# Altium PCB PCB2.PcbDoc
Units mil, origin at the board's own origin, x right, y up, seen from the top; angles counter-clockwise.
Board outline 866.14 x 866.14 mil, 4 copper layers (Top Layer, Internal Plane 1, Signal Layer 1, Bottom Layer), stack 30.634 mil thick; 54 components, 32 nets, 173 pads, 243 vias.
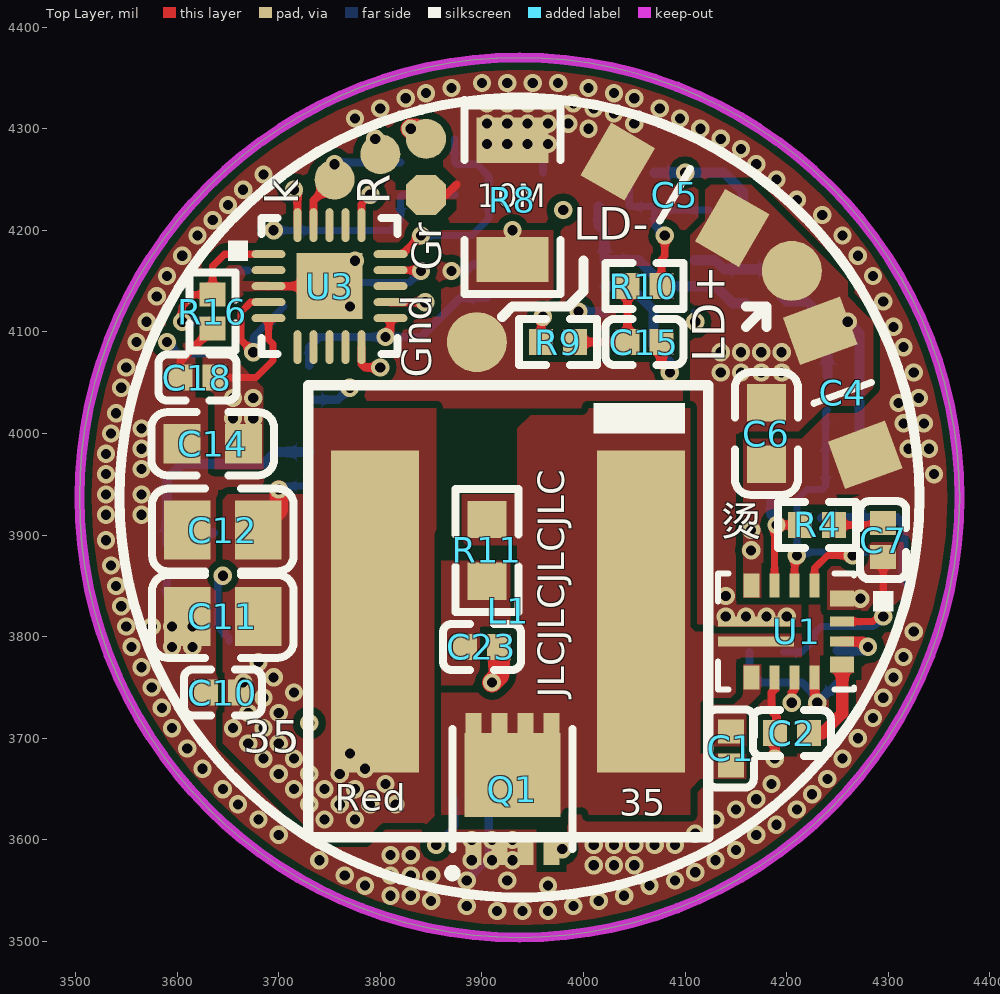
[diagram p0: Top Layer view]
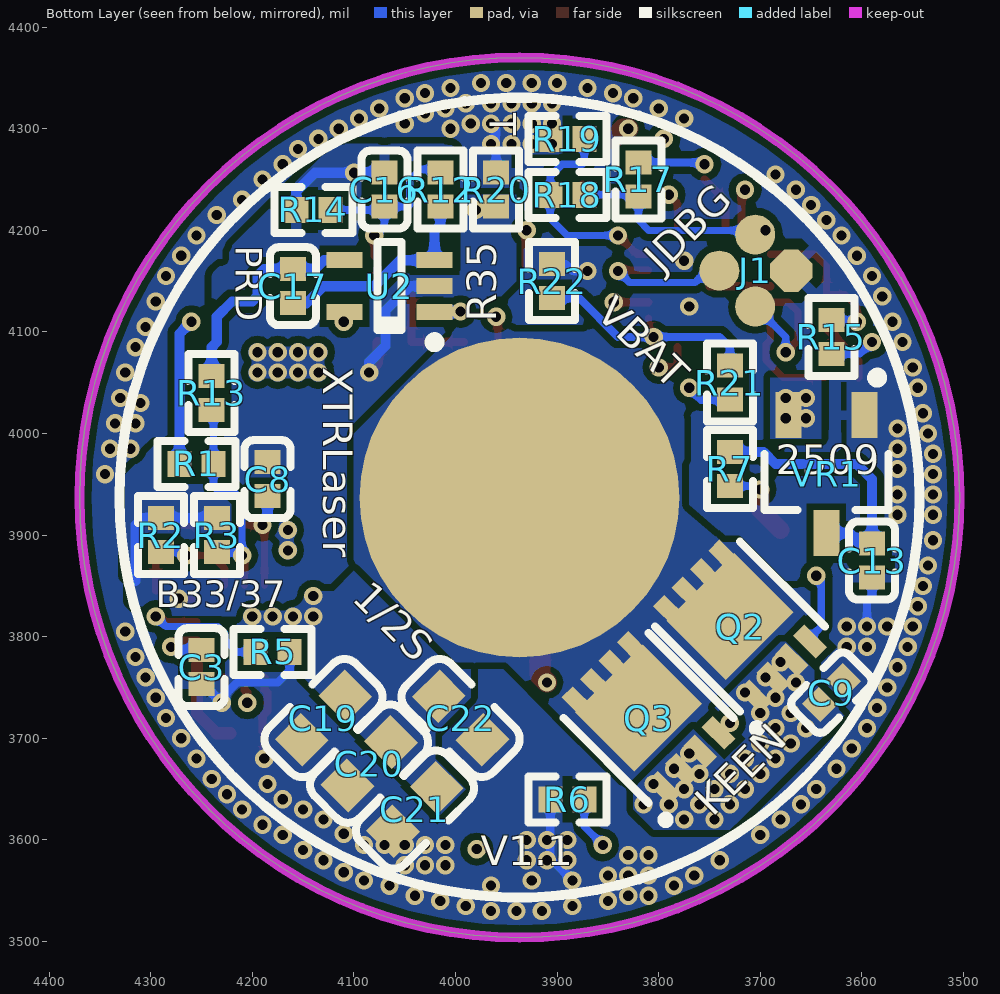
[diagram p1: Bottom Layer view, seen from below]
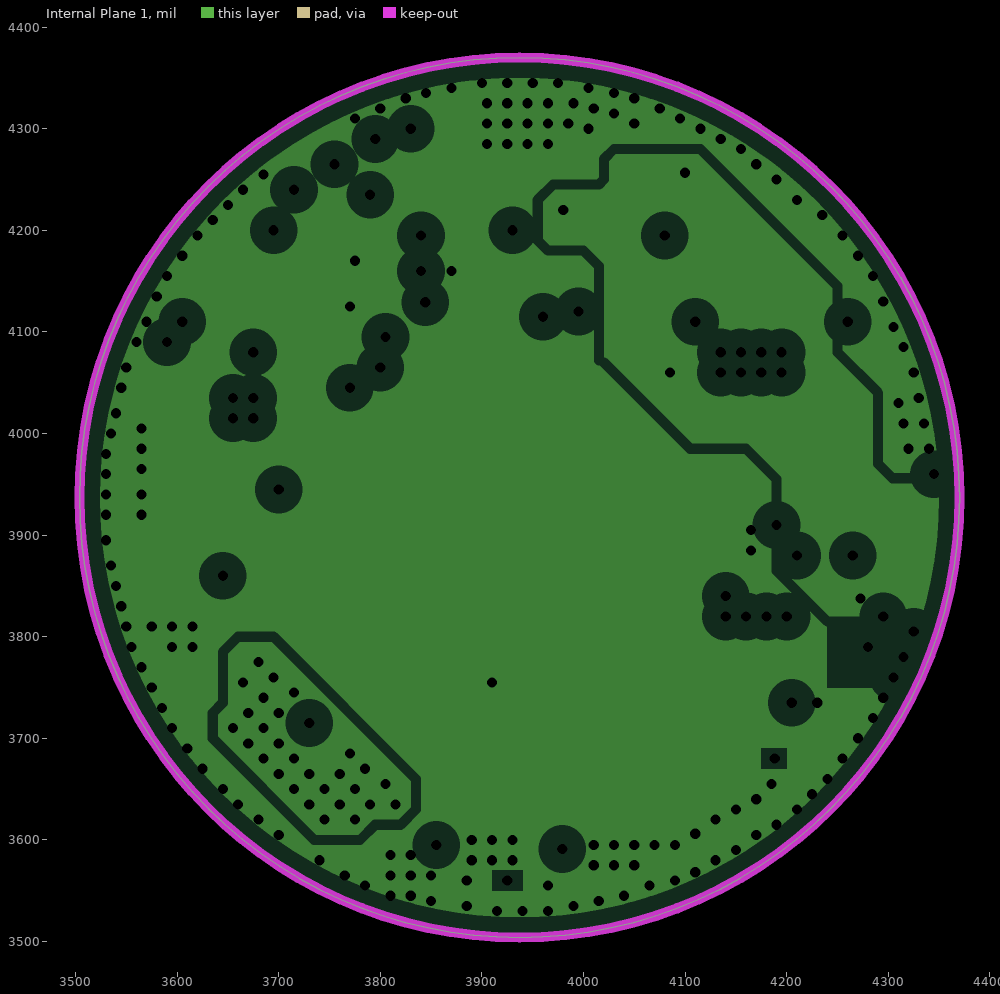
[diagram p2: Internal Plane 1, clearances drawn from the general rule]
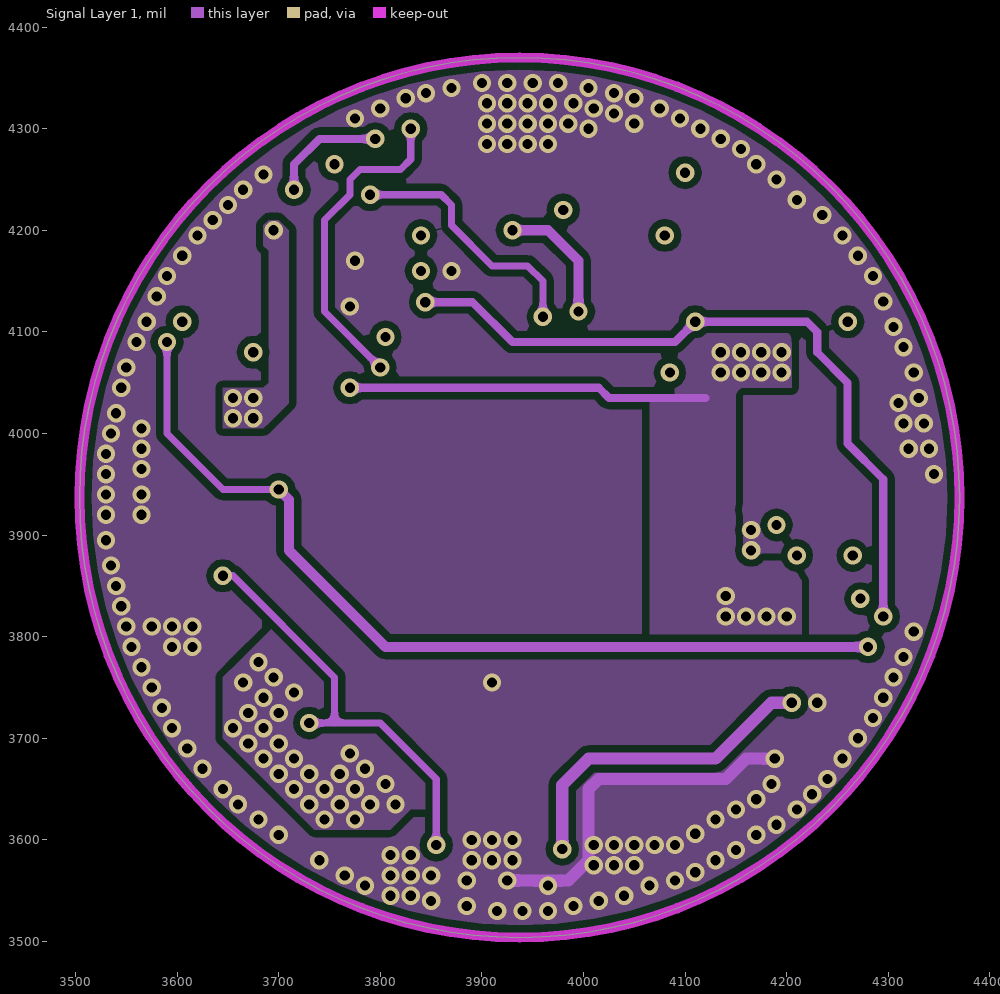
[diagram p3: Signal Layer 1]
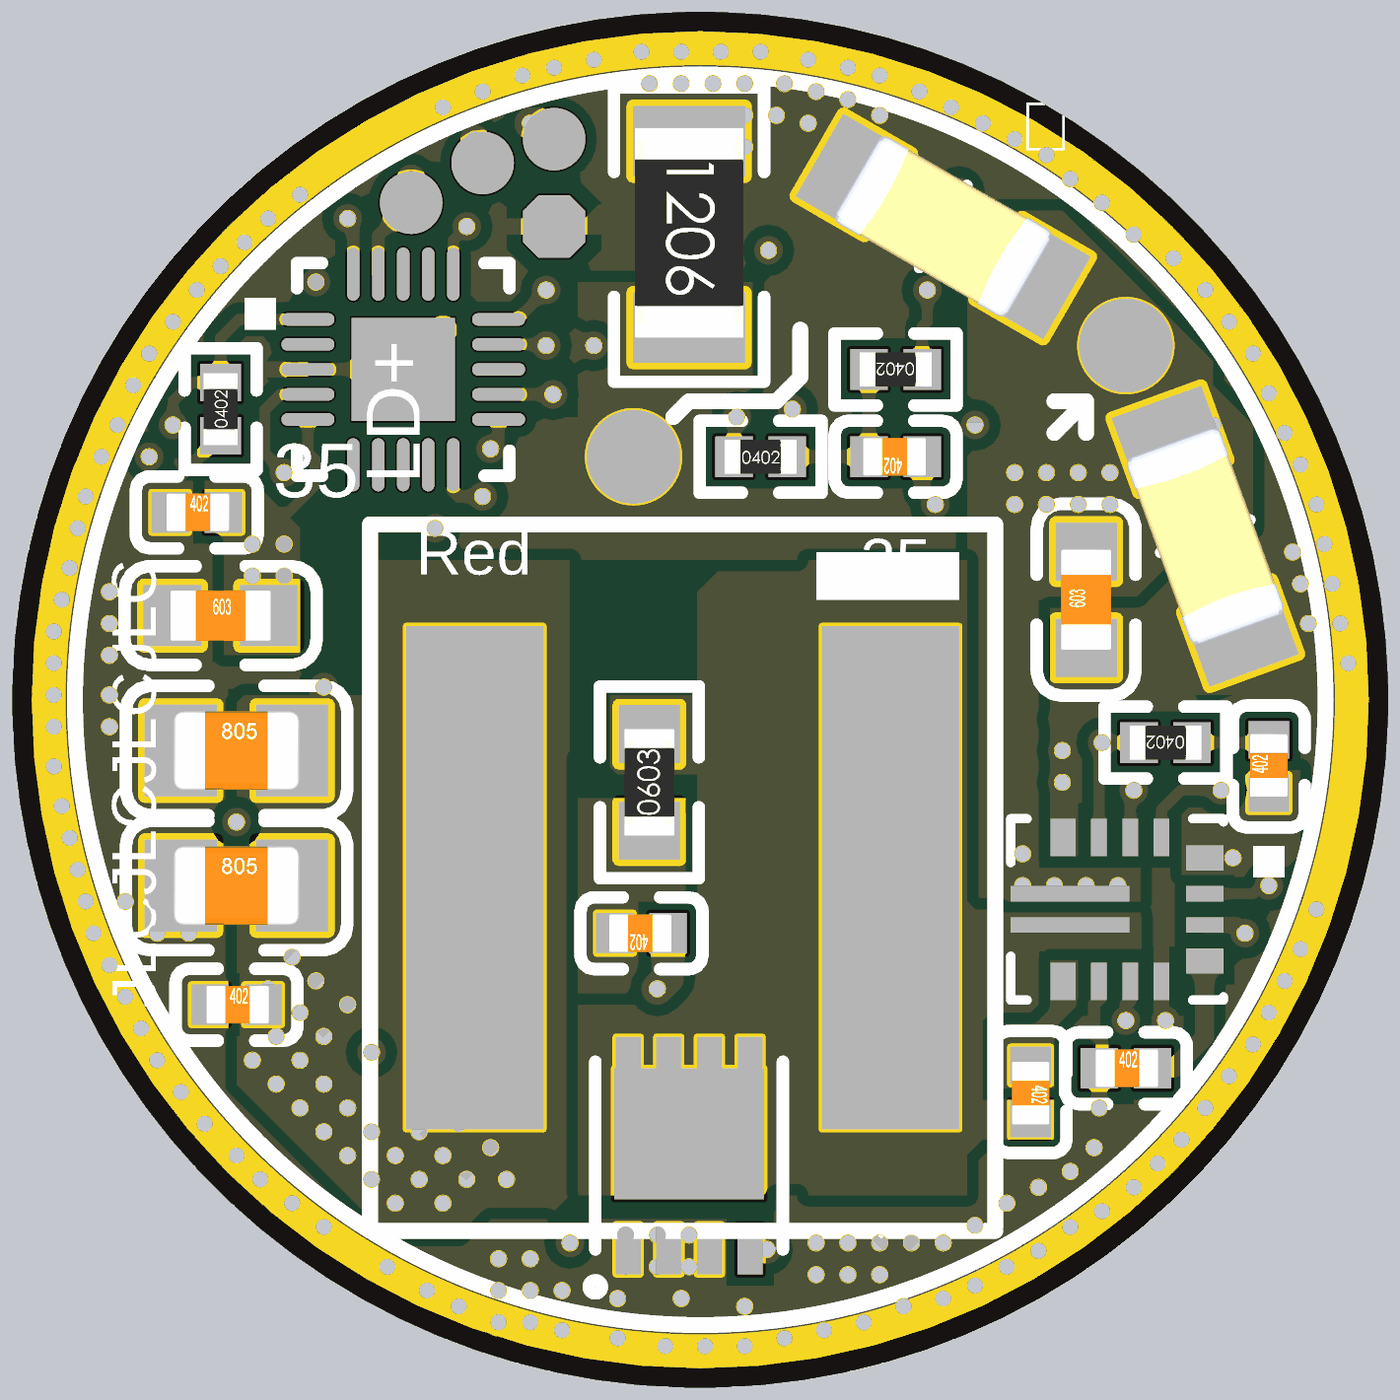
[diagram p4: 3D render of the assembled board from above, using the file's embedded part models]
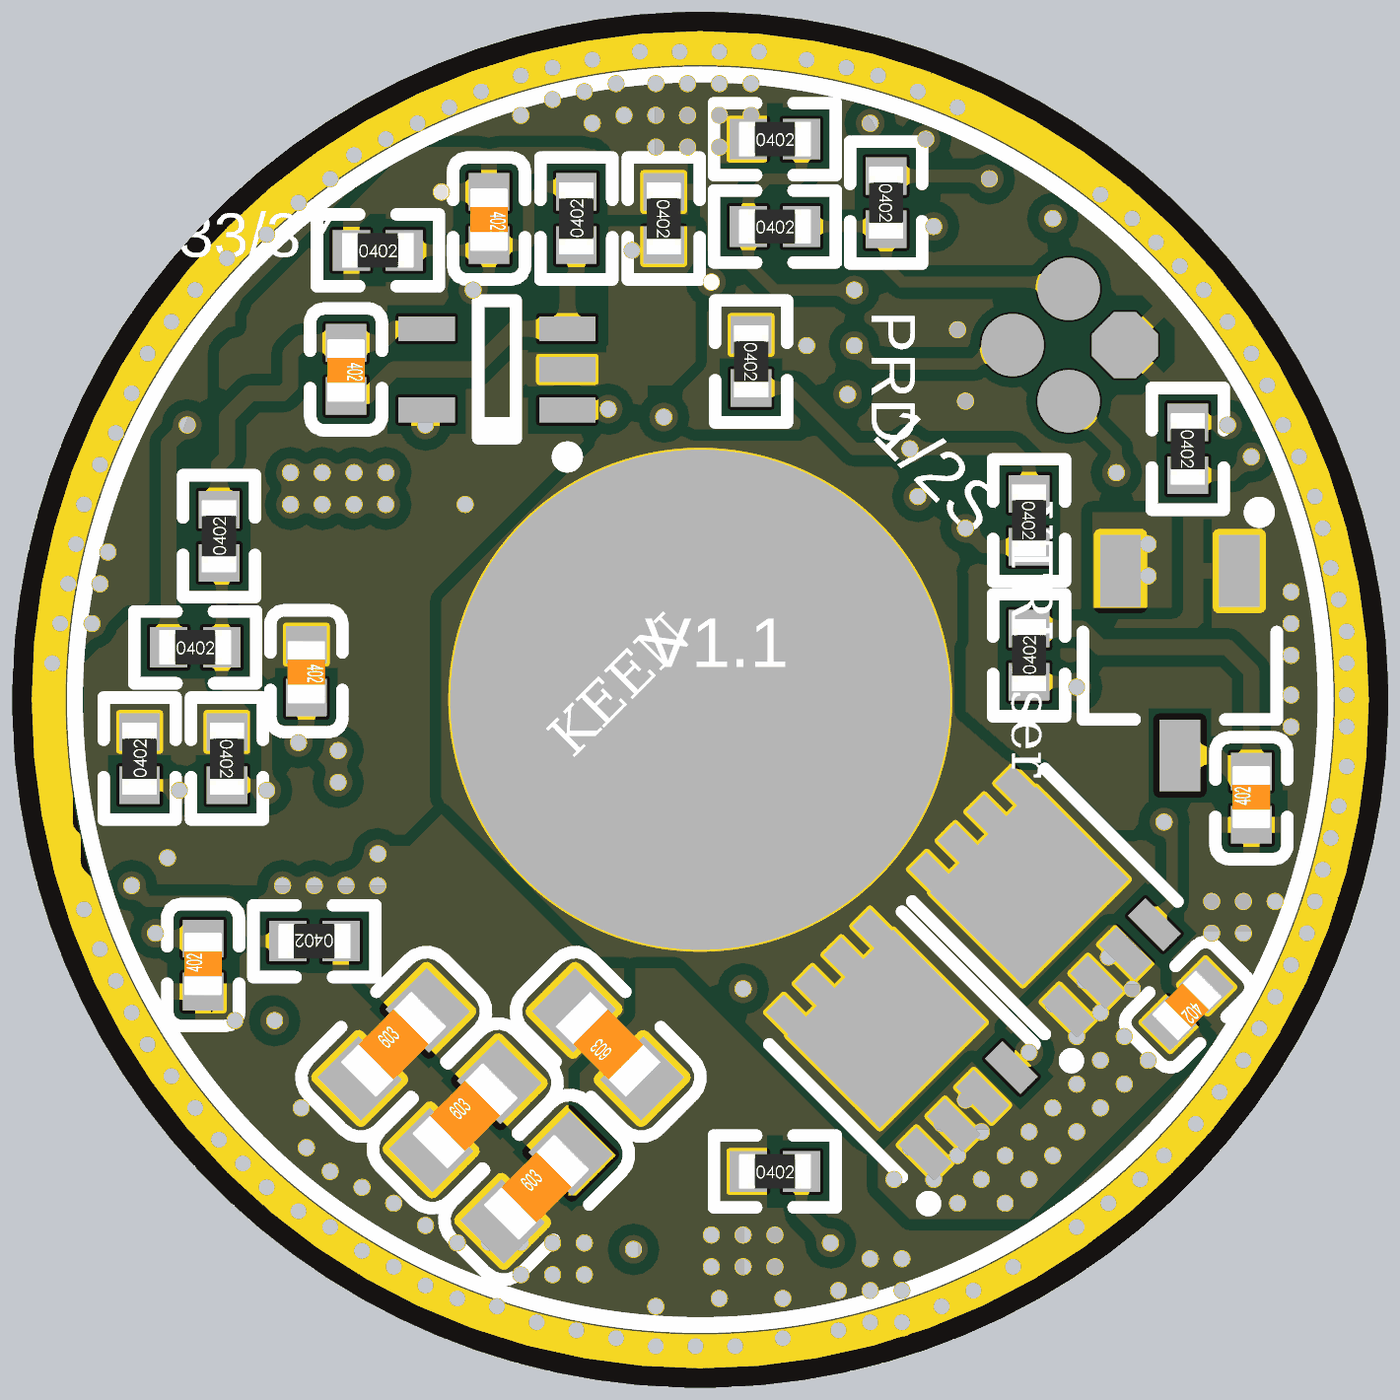
[diagram p5: 3D render of the assembled board from below, using the file's embedded part models]

## Layer stack, top to bottom
Top Solder: solder mask 0.4, Solder Resist, Dk 3.5
Top Layer: signal copper 1.4
Dielectric 1: core 10, FR-4, Dk 4.2
Internal Plane 1: plane copper 1.417
Dielectric 3: prepreg 5, Dk 4.2
Signal Layer 1: signal copper 1.417
Dielectric 2: core 10, Dk 4.2
Bottom Layer: signal copper 1.4
Bottom Solder: solder mask 0.4, Solder Resist, Dk 3.5

## Board outline
3937.01,3503.94 cw(c3937.01,3937.01) 3503.94,3937.01 cw(c3937.01,3937.01) 3937.01,4370.08 cw(c3937.01,3937.01) 4370.08,3937.01 cw(c3937.01,3937.01)

## Design rules (kind name [scope] priority, off if disabled: settings)
Clearance [All] p1: gap=7
PlaneClearance [All] p1: clearance=18.5
PlaneConnect [All] p1: planeconnectstyle=Direct reliefexpansion=20 reliefentries=4 reliefconductorwidth=10 reliefairgap=10
PolygonConnect PolygonConnect_1 [IsVia] p1: connectstyle=Direct reliefconductorwidth=10 reliefentries=4 polygonreliefangle="90 Angle" airgapwidth=10
PolygonConnect [All] p2: connectstyle=Direct reliefconductorwidth=10 reliefentries=4 polygonreliefangle="90 Angle" airgapwidth=10
RoomDefinition main [InComponentClass('main')] p1: confinementstyle=ConfineIn formatcopy=TRUE lockcomponents=FALSE outline 4435,3445 5340,3445 5340,3865 4435,3865
RoutingVias [All] p1: holewidth=28 width=50 viastyle="Through Hole" minholewidth=28 minwidth=50 maxholewidth=28 maxwidth=50
SolderMaskExpansion [All] p1: expansion=4
Width [All] p1: maxlimit=100 minlimit=7 preferedwidth=10
28 further rules are at their usual default settings.

## Components (designator, comment, footprint, x,y, rotation, side; value= is the part's Value field where it differs from the comment)
C1 "100nF (104) 10% 16V" 0402_C 4145,3690 r270 top
C2 "4.7uF (475) 20% 10V" 0402_C 4205,3705 r0 top
C3 "100nF (104) 10% 16V" 0402_C 4250,3770 r90 bottom
C4 "GRM31CR61E476ME44L" 1206C 4255,4040 r110 top
C5 "GRM31CR61E476ME44L" 1206C 4090,4235 r330 top
C6 "CL10A106MA8NRNC" 0603_C 4180,4000 r90 top
C7 "47nF (473) 10% 50V" 0402_C 4295,3895 r90 top
C8 "56pF (560) 5% 50V" 0402_C 4185,3955 r270 bottom
C9 "10uF (106) 20% 10V" 0402_C 3630,3745 r315 bottom
C10 "10uF (106) 20% 10V" 0402_C 3645,3745 r0 top
C11 "47uF (476) 20% 10V" 0805_C 3645,3820 r0 top
C12 "47uF (226) 20% 10V" 0805_C 3645,3905 r0 top
C13 "10uF (106) 20% 10V" 0402_C 3590,3875 r90 bottom
C14 "CL10A106MA8NRNC" 0603_C 3635,3990 r0 top
C15 "1.0uF (105) 10% 25V" 0402_C 4060,4090 r180 top
C16 "10nF (103) 10% 50V" 0402_C 4070,4240 r270 bottom
C17 "8.2nF (822) 10% 50V" 0402_C 4160,4145 r270 bottom
C18 "100nF (104) 10% 16V" 0402_C 3620,4055 r0 top
C19 "CL10A106MA8NRNC" 0603_C 4130,3720 r135 bottom
C20 "CL10A106MA8NRNC" 0603_C 4085,3675 r135 bottom
C21 "CL10A106MA8NRNC" 0603_C 4040,3630 r135 bottom
C22 "CL10A106MA8NRNC" 0603_C 3995,3720 r45 bottom
C23 "2.2nF (222) 10% 50V" 0402_C 3900,3790 r180 top
J1 "CMS8S-JTAG-TP-1.27mm" CMS8S-JTAG-TP-2x2-P1.27 3705,4125 r45 top
L1 "XAL1060-472MEC" XAL1060-472ME-LIFTED 3795,3825 r0 top
Q1 "BSZ018N04LS6" DFN-8_L3.0-W3.0-P0.65-BL 3930,3650 r0 top
Q2 "XPX80P02RX" DFN-8_L3.0-W3.0-P0.65-BL 3720,3810 r135 bottom
Q3 "XPX80P02RX" DFN-8_L3.0-W3.0-P0.65-BL 3810,3720 r135 bottom
R1 "470KΩ (4703) ±1%" 0402_R 4255,3970 r180 bottom
R2 "20KΩ (2002) ±1%" 0402_R 4290,3900 r90 bottom
R3 "39KΩ (3902) ±1%" 0402_R 4235,3900 r270 bottom
R4 "10KΩ (1002) ±1%" 0402_R 4230,3910 r180 top
R5 "10KΩ (1002) ±1%" 0402_R 4180,3785 r0 bottom
R6 "10KΩ (1002) ±1%" 0402_R 3890,3640 r180 bottom
R7 "10Ω (10R0) ±1%" 0402_R 3730,3965 r90 bottom
R8 "RLM12FTCMR010" 1206_R 3930,4230 r270 top
R9 "10KΩ (1002) ±1%" 0402_R 3975,4090 r0 top
R10 "110KΩ (1103) ±1%" 0402_R 4060,4145 r180 top
R11 "2.2Ω (2R20) ±1%" 0603_R 3905,3885 r90 top
R12 "470Ω (4700) ±1%" 0402_R 4015,4240 r90 bottom
R13 "100KΩ (1003) ±1%" 0402_R 4240,4040 r90 bottom
R14 "2KΩ (2001) ±1%" 0402_R 4140,4220 r180 bottom
R15 "470KΩ (4703) ±1%" 0402_R 3630,4095 r270 bottom
R16 "100KΩ (1003) ±1%" 0402_R 3635,4120 r90 top
R17 "10KΩ (1002) ±1%" 0402_R 3820,4250 r270 bottom
R18 "470KΩ (4703) ±1%" 0402_R 3890,4235 r180 bottom
R19 "SDNT1005X104F4250FTF" 0402_R 3890,4290 r180 bottom
R20 "0Ω (0R0) ±1%" 0402_R 3960,4240 r270 bottom
R21 "680KΩ (6803) ±1%" 0402_R 3730,4050 r270 bottom
R22 "59KΩ (5902) ±1%" 0402_R 3905,4150 r270 bottom
U1 "TPS61287RZPR" RZP0014A-TPS61287 4210,3805 r270 top locked
U2 "TSZ121ICT" SC70-5 4065,4145 r0 bottom
U3 "CMS8S6990NAQN20" QFN40P300X300X800_HS-21N 3750,4145 r0 top
VR1 "ME6209A30M3G" SOT-23-3L 3635,3960 r90 bottom locked

## Footprints (in the part's own frame and the unit in brackets; to place one, negate y for a bottom-side part, rotate by r counter-clockwise, add the part's x,y. Pads: shape width x height; smd on the part's side, far side on the other; paste and mask are expansions set on the pad)
0402_C [mm]
  rect 0.6x0.65 smd mask+0.051: 1(-0.425,0) 2(0.425,0)
  silkscreen extent -0.97,-0.58 0.97,0.58, body extent -0.48,-0.3 0.52,0.3, height 0.2
0402_R [mm]
  rect 0.6x0.65 smd mask+0.051: 1(-0.425,0) 2(0.425,0)
  silkscreen extent -0.97,-0.58 0.97,0.58, body extent -0.57,-0.27 0.57,0.28, height 0.41
0603_C [mm]
  rect 0.93x0.98 smd: 1(-0.77,0) 2(0.77,0)
  silkscreen extent -1.53,-0.79 1.54,0.79, body extent -0.8,-0.4 0.8,0.4, height 0.3
0603_R [mm]
  rect 0.93x0.98 smd: 1(-0.77,0) 2(0.77,0)
  silkscreen extent -1.53,-0.79 1.54,0.79, body extent -0.85,-0.4 0.85,0.4, height 0.56
0805_C [mm]
  rect 1.16x1.47 smd: 1(-0.89,0) 2(0.89,0)
  silkscreen extent -1.77,-1.04 1.77,1.04, body extent -1,-0.62 1,0.63, height 0.77
1206_R [mm]
  rect 1.13x1.8 smd: 1(-1.49,0) 2(1.49,0)
  silkscreen extent -2.36,-1.2 2.35,1.2, body extent -1.7,-0.86 1.65,0.87, height 0.85
1206C [mil]
  rect 50x60 smd: 1(-65,0) 2(65,0)
  silkscreen extent 0,-30 0,30, body extent -63,-31 63,31, height 37
CMS8S-JTAG-TP-2x2-P1.27 [mm] "面向CMS8S单片机使用的2*2排列，间距1.27mm的调试接口"
  oct 1x1 smd far side mask+0.03: 1(0,1.27)
  round 1 smd far side mask+0.03: 2(1.27,1.27) 3(0,0) 4(1.27,0)
DFN-8_L3.0-W3.0-P0.65-BL [mm]
  rect 0.4x0.8 smd paste-100 mask+0.051: 1(-0.975,-1.5) 2(-0.325,-1.5) 3(0.325,-1.5) 4(0.975,-1.5) 5(0.975,1.5) 6(0.325,1.5) 7(-0.325,1.5) 8(-0.975,1.5)
  rect 2.4x2.1 smd paste-100 mask+0.051: 8(0,0.35)
  silkscreen extent -1.6,-2.2 1.5,1.5, body extent -1.52,-1.52 1.52,1.52, height 1.2
QFN40P300X300X800_HS-21N [mm] "QFN, 20-Leads, Body 3.00x3.00mm, Pitch 0.40mm, Thermal Pad 1.65x1.65mm, IPC Medium Density"
  oval 0.85x0.2 smd mask+0.03: 1(-1.525,0.8) 2(-1.525,0.4) 3(-1.525,0) 4(-1.525,-0.4) 5(-1.525,-0.8) 11(1.525,-0.8) 12(1.525,-0.4) 13(1.525,0) 14(1.525,0.4) 15(1.525,0.8)
  oval 0.2x0.85 smd mask+0.03: 6(-0.8,-1.525) 7(-0.4,-1.525) 8(0,-1.525) 9(0.4,-1.525) 10(0.8,-1.525) 16(0.8,1.525) 17(0.4,1.525) 18(0,1.525) 19(-0.4,1.525) 20(-0.8,1.525)
  rect 1.65x1.65 smd mask+0.03: 21(0,0)
  silkscreen extent -1.7,-1.7 1.7,1.7, body extent -1.55,-1.55 1.55,1.55, height 0.8
RZP0014A-TPS61287 [mm]
  rect 0.6x0.25 smd paste+0 mask+0: 1(-1.15,0.443) 2(-1.15,-0.057) 3(-1.15,-0.557) 8(1.15,-0.557) 9(1.15,-0.057) 10(1.15,0.443)
  rect 0.6x0.4 smd paste+0 mask+0: 4(-1.15,-1.132) 7(1.15,-1.132)
  rect 0.25x1.9 smd paste+0 mask+0: 5(-0.25,-1.017) 6(0.25,-1.017)
  rect 0.4x0.6 smd paste+0 mask+0: 11(0.825,1.133) 14(-0.825,1.133)
  rect 0.25x0.6 smd paste+0 mask+0: 12(0.25,1.133) 13(-0.25,1.133)
  silkscreen extent -1.45,-1.97 1.45,1.43, body extent -1.4,-1.92 1.4,1.38, height 1
SC70-5 [mm] "SOT23, 6-Leads, Body 2.00x2.10mm, Pitch 0.65mm, IPC Medium Density"
  rect 0.9x0.4 smd mask+0.05: 1(-1.125,0.65) 2(-1.125,0) 3(-1.125,-0.65) 4(1.125,-0.65) 5(1.125,0.65)
  silkscreen extent -1.25,-1.1 0.3,1.52, body extent -0.67,-1.1 0.67,1.1, height 1.1
SOT-23-3L [mm] "http://www.aosmd.com/res/packaging_information/SOT-23-3L.pdf"
  rect 1.15x0.65 smd: 1(1.475,-0.95) 2(1.475,0.95) 3(-1.475,0)
  silkscreen extent -0.9,-1.55 2.54,1.55, body extent -0.9,-1.55 0.9,1.55, height 1.25
XAL1060-472ME-LIFTED [mm] "线艺XAL1060电感的特殊封装，使用铜条向上抬升电感高度在电感下部塞元器件"
  rect 2.2x8.05 smd mask+0.05: 1(0,0) 2(6.65,0)
  silkscreen extent -1.68,-5.65 8.32,5.65, body extent -1.65,-5.71 8.38,5.71, height 7

## Part data
C1 C3 C7 C18: library part "0402 100nF (104) 10% 16V", "贴片电容"
C2: library part "0402 4.7uF (475) 20% 10V", "贴片电容"
C4 C5: library part Cap, "村田1206 MLCC 25V 47uF± 20% X5R"
C6 C14 C19 C20 C21 C22: library part "0603 10uF (106) 10% 10V", "三星MLCC X5R 10uF ±20% 25V 0603封装"
C8: library part "0402 56pF (560) 5% 50V", "贴片电容"
C9 C10 C13: library part "0402 10uF (106) 20% 6.3V", "贴片电容"
C11 C12: library part "0805 22uF (226) 20% 25V", "贴片电容"
C15: library part "0402 1.0uF (105) 10% 25V", "贴片电容"
C16 C17: library part "0402 22nF (223) 10% 50V", "贴片电容"
C23: library part "0402 2.2nF (222) 10% 50V", "贴片电容"
J1: "面向CMS8S6990NA单片机的调试贴片触点，并不是元器件实物"
L1: library part "Inductor Iron", "线艺一体成型模压电感，9.8mΩ DCR 25A饱和电流 4.7uH±20%电感量 10*11*6mm尺寸"
Q1 Q2 Q3: library part "SON/DFN5x6 MOS", "PDFN3x3 30V 50A N沟道MOSFET"
R1 R15 R18 R21: library part "0402 470KΩ (4703) 1%", "贴片电阻"
R2: library part "0402 20KΩ (2002) 1%", "贴片电阻"
R3: library part "0402 39KΩ (3902) 1%", "贴片电阻"
R4: library part "0402 12KΩ (1202) 1%", "贴片电阻"
R5 R6 R9 R14 R17: library part "0402 10KΩ (1002) 1%", "贴片电阻"
R7: library part "0402 10Ω (10R0) 1%", "贴片电阻"
R8: library part "1206 0Ω (0R0) 1%", "10mΩ ±1% 1W 1206封装合金检流电阻"
R10: library part "0402 75KΩ (7502) 1%", "贴片电阻"
R11: library part "0603 2.2Ω (2R20) 1%", "贴片电阻"
R12: library part "0402 470Ω (4700) 1%", "贴片电阻"
R13 R16: library part "0402 100KΩ (1003) 1%", "贴片电阻"
R19: library part "0402 200KΩ (2003) 1%", "贴片热敏电阻0402 B4250 100K ±1%"
R20: library part "0402 0Ω (0R0) 1%", "贴片电阻"
R22: library part "0402 68KΩ (6802) 1%", "贴片电阻"
U1: library part TPS61287, "Synchronous Boost Converter with Stackable Multi-Phase Function"
U2: library part LMV321IDCKR, "CMOS超小型0漂移斩波结构运算放大器，SC70-5封装，400KHz GBW"
U3: library part CM8S6990NA-QFN20, "增强型闪存1T 8051单片机，16KB Flash 256+1K XRAM，QFN3x3-20P封装"
VR1: library part "SOT-23 XC6206P332MR", "低压差线性稳压(LDO)"

## Free pads (board coordinates)
  round 59.06 smd mask+1.18: 0(3895,4090) 0(4205,4160)
  round 314.96 smd far side mask+1.18: 1(3937.01,3937.01)
  round 39.37 smd mask+1.18: 2(3845,4290) 3(3800,4275) 4(3755,4250)
  oct 39.37x39.37 smd mask+1.18: 5(3845,4235)

## Via types
v1: diameter 18, hole 10, Top Layer to Bottom Layer, tented both sides, 243 vias

## Nets (pads, with @x,y where several pads share a name; then routed paths per layer and width w, separated by ;. In a path a pad name is that pad's centre, name@x,y a point inside that pad or via, vN(x,y) a via of type N, cw(c..) or ccw(c..) an arc to the next point about the centre after c; other vN are vias at no path point)
8V4: C3.2 C9.2 C10.2 C11.2 C12.2 L1.1 Q2.1 Q2.2 Q2.3 Q3.1 Q3.2 Q3.3 R7.1 R15.2 U1.12 | length 1079.7
  Top Layer w10: U1.12 4274.84,3795.16 v1(4280,3790)
  Top Layer w18: C12.2 3700,3924.96 v1(3700,3945)
  Signal Layer 1 w7: v1(3590,4090) 3590,4000 3645,3945 v1(3700,3945)
  Signal Layer 1 w10: v1(3700,3945) 3710,3935 3710,3885 3805,3790 v1(4280,3790)
  Bottom Layer w7: v1(3590,4090) 3601.73,4078.27 R15.2 ; v1(3700,3945) 3703.27,3948.27 R7.1
  Bottom Layer w10: C3.2 4276.73,3786.73 v1(4280,3790)
  other v1: 3745,3620 3775,3620 3730,3635 3760,3635 3790,3635 3815,3635 3715,3650 3745,3650 3775,3650 3805,3655 3700,3665 3730,3665 3760,3665 3785,3670 3685,3680 3715,3680 3770,3685 3670,3695 3700,3695 3655,3710 3685,3710 3670,3725 3700,3725 3685,3740 3715,3745 3665,3755 3695,3760 3680,3775
BST: C1.1 U1.7
COMP: C8.2 R4.2 U1.3 | length 111.2
  Top Layer w7: U1.3 4188.05,3903.05 4195,3910 R4.2
  Bottom Layer w10: C8.2 4185,3920 4190,3915 v1(4190,3910)
DCEN: R5.2 U1.13 U2.5 U3.12 | length 928.6
  Top Layer w7: U1.13 4284.84,3814.84 4290,3820 v1(4295,3820)
  Top Layer w8: U3.12 v1(3844.25,4129.25)
  Signal Layer 1 w8: v1(3844.25,4129.25) 3890.75,4129.25 3930,4090 4090,4090 v1(4110,4110) 4220,4110 4230,4100 4230,4080 4260,4050 4260,3990 4295,3955 v1(4295,3820)
  Bottom Layer w7: U2.5 4109.29,4108.04 4110,4108.04 v1(4110,4110) ; R5.2 4215,3785 4226.7,3796.7 4226.7,3802.89 4233.81,3810 4285,3810 v1(4295,3820)
DSCK: J1.4 U3.14 | length 140.1
  Top Layer w7: U3.14 3839.25,4160.75 v1(3840,4160)
  Bottom Layer w7: J1.4@3740.71,4160 J1.4 3752.42,4160.36 3764.31,4148.46 3828.46,4148.46 v1(3840,4160)
DSDA: J1.3 U3.4 | length 133.3
  Top Layer w7: v1(3675,4080) 3662.73,4092.27 3662.73,4119.48 3672.5,4129.25 U3.4
  Bottom Layer w7: v1(3675,4080) 3675,4095 J1.3
FB: R1.2 R3.2 R13.1 U1.2 | length 219.8
  Top Layer w7: U1.2 4207.74,3879.27 v1@4211.73,3883.27
  Bottom Layer w7: R3.2 4211.73,3883.27 4210,3885 4210,3935 4220,3945 4235,3945 4238.27,3948.27 R1.2 4238.27,4021.54 R13.1
  other v1: 4210,3880
GLED: pad.2 U3.10 | length 372
  Top Layer w8: U3.10 3781.5,4068.5 3785,4065 v1(3800,4065)
  Top Layer w20: v1(3830,4300) 3835,4300 pad.2
  Signal Layer 1 w7: v1(3800,4065) 3745,4120 3745,4210 3770,4235 3770,4250 3780,4260 3820,4260 3830,4270 v1(3830,4300)
GND: C2.1 C3.1 C4.1 C5.1 C6.1 C9.1 C10.1 C11.1 C12.1 C13.1 C14.1 C18.1 C19.1 C20.1 C21.1 C22.1 C23.1 J1.1 pad.5 Q1.1 Q1.2 Q1.3 R5.1 R6.1 R8.1 R16.1 R19.1 R20.1 R22.1 U1.4 U1.8 U1.10 U3.3 U3.21 VR1.1 | length 1020
  Top Layer w8: C18.1 3603.27,4071.54 R16.1 ; U3.3 U3.21 ; pad.5 3864.8,4235 3875,4245.2 ; U1.8 4188.05,3748.05 4185,3745 4185,3726.72 4190,3721.72 4190,3706.73 C2.1 v1(4188.27,3680) ; v1@4227.42,3735 U1.10
  Top Layer w20: v1(3910,3755) 3916.73,3761.73 C23.1
  Signal Layer 1 w12: v1(3925,3560) 3985,3560 4005,3580 4005,3650 4015,3660 4140,3660 4160,3680 v1(4188.27,3680)
  Bottom Layer w8: C13.1 3590,3840 3595,3835 v1(3595,3810) ; J1.1@3659.64,4160.36 J1.1 ; v1(3870,4160) 3885,4160 3891.73,4166.73 R22.1 ; v1(3885,3560) 3906.73,3581.73 R6.1 ; R20.1 v1@3960,4305 ; R5.1 4163.27,3766.73 4175,3755 4215,3755 4230,3740 v1(4230,3735) 4248.27,3753.27 C3.1
  other v1: 3915,3530 3940,3530 3965,3530 3885,3535 3990,3535 3850,3540 4015,3540 3810,3545 3830,3545 4040,3545 3785,3555 3965,3555 4065,3555 4090,3560 3765,3565 3810,3565 3830,3565 3850,3565 4110,3568.19 4010,3575 4030,3575 4050,3575 3740,3580 3890,3580 3910,3580 3930,3580 4130,3580 3810,3585 3830,3585 4150,3590 4010,3595 4030,3595 4050,3595 4070,3595 4090,3595 3890,3600 3910,3600 3930,3600 3700,3605 4170,3605 4110,3606.01 4190,3615 3680,3620 4130,3620 4150,3630 4210,3630 3660,3635 4170,3640 4225,3645 3645,3650 4185,3655 4240,3660 3625,3670 4255,3680 3610,3690 4270,3700 3595,3710 4285,3720 3585,3730 4295,3740 3575,3750 4305,3760 3565,3770 4315,3780 3555,3790 3595,3790 3615,3790 4325,3805 3550,3810 3575,3810 3615,3810 3545,3830 3540,3850 3535,3870 4165,3885 3530,3895 4165,3905 3530,3920 3565,3920 3530,3940 3565,3940 3530,3960 4345,3960 3565,3965 3530,3980 3565,3985 4320,3985 4340,3985 3535,4000 3565,4005 4315,4010 4335,4010 3540,4020 4310,4030 4330,4035 3545,4045 4325,4060 3550,4065 4315,4085 3560,4090 4305,4105 3570,4110 3770,4125 4295,4130 3580,4135 3590,4155 4285,4155 3775,4170 3605,4175 4270,4175 3620,4195 4255,4195 3635,4210 4235,4215 3650,4225 4210,4230 3665,4240 4190,4250 3685,4255 4170,4265 4155,4280 3905,4285 3925,4285 3945,4285 3965,4285 4135,4290 4005,4300 4115,4300 3905,4305 3925,4305 3945,4305 3965,4305 3985,4305 4050,4305 3775,4310 4095,4310 4030,4315 3800,4320 4010,4320 4075,4320 3905,4325 3925,4325 3945,4325 3965,4325 3990,4325 3825,4330 4050,4330 3845,4335 4030,4335 3870,4340 4005,4340 3900,4345 3925,4345 3950,4345 3975,4345
ILIM: R2.1 U1.1 | length 91.3
  Top Layer w7: U1.1 4227.42,3867.42 4240,3880 v1(4265,3880)
  Bottom Layer w7: v1@4260,3880 4270,3880 4273.27,3883.27 R2.1
INJO: C17.1 R13.2 U2.4 | length 220.8
  Bottom Layer w10: U2.4 4129.41,4170.59 4138.27,4161.73 C17.1 4188.27,4161.73 4195,4155 4195,4135 4200,4130 4220,4130 4235,4115 4235,4090 4240,4085 R13.2
INTVCC: C2.2 U1.11 | length 88.9
  Top Layer w12: C2.2 4235,3705 4254.59,3724.59 U1.11
IPWM: R9.1 U3.16 | length 311.1
  Top Layer w7: U3.16 3781.5,4226.5 v1(3790,4235) ; R9.1 3958.27,4113.27 v1(3960,4115)
  Signal Layer 1 w7: v1(3790,4235) 3860,4235 3870,4225 3870,4205 3910,4165 3945,4165 3960,4150 v1(3960,4115)
KEY: pad.4 R17.1 U3.19 | length 118.6
  Top Layer w8: U3.19 3734.25,4229.25 pad.4
  Bottom Layer w8: v1@3755,4266.73 R17.1
  other v1: 3755,4265
LD-: pad.0@3895,4090 R8.2 U2.1 | length 187
  Top Layer w10: R8.2@3930,4166.34 v1(3930,4200)
  Signal Layer 1 w10: v1(3930,4200) 3965,4200 3995,4170 v1(3995,4120)
  Bottom Layer w10: v1(3995,4120) 3995.59,4119.41 U2.1
LDRV: Q1.4 U1.9 | length 360.4
  Top Layer w8: Q1.4 v1(3979.06,3590.94) v1@3980,3590 ; v1(4205,3735) 4205,3745 4207.74,3747.74 U1.9
  Signal Layer 1 w12: v1(3979.06,3590.94) 3979.06,3654.06 4005,3680 4130,3680 4185,3735 v1(4205,3735)
NetC7_2: C7.2 R4.1 | length 49
  Top Layer w7: R4.1 4293.27,3910 C7.2
NetC13_2: C13.2 R7.2 VR1.3 | length 263.6
  Bottom Layer w10: VR1.3 3611.93,3901.93 3601.73,3891.73 C13.2 3590,3955 3605,3970 3685,3970 3696.73,3981.73 R7.2
NetC15_2: C15.2 R9.2 R10.2 | length 106.5
  Top Layer w8: R9.2 C15.2 R10.2
NetC23_2: C23.2 R11.1
OPNEG: C17.2 R12.1 U2.3 | length 211.9
  Bottom Layer w10: R12.1 4015,4205 4020.71,4199.29 U2.3 4054.41,4170.59 4080,4145 4130,4145 4146.73,4128.27 C17.2
REVG: Q2.4 Q3.4 R6.2 | length 533.1
  Signal Layer 1 w7: v1(3645,3860) 3655,3860 3755,3760 3755,3715 ; v1(3730,3715) 3755,3715 ; v1(3855,3595) 3855,3660 3800,3715 3755,3715
  Bottom Layer w7: v1(3645,3860) 3640,3855 3640,3810 3651.09,3798.91 Q2.4 ; v1(3855,3595) 3873.27,3613.27 R6.2
RLED: pad.3 U3.20 | length 151.8
  Top Layer w8: v1(3715,4240) 3718.5,4236.5 U3.20
  Signal Layer 1 w8: v1(3715,4240) 3715,4265 3740,4290 v1(3795,4290)
SGND: C7.1 C8.1 C15.1 C16.1 R2.2 R3.1 R14.1 R20.2 U1.14 U2.2 | length 460.9
  Top Layer w7: U1.14 v1(4272.48,3837.48) ; 4295,3845 C7.1
  Top Layer w10: C15.1 4076.73,4068.27 v1(4085,4060)
  Bottom Layer w10: U2.2 4045,4145 4069,4121 4069,4086.3 4085,4070.3 v1(4085,4060) ; C16.1 4138.27,4256.73 4156.73,4238.27 R14.1 ; R3.1 R2.2 4308.27,3916.73 4315,3910 4315,3855
  other v1: 3980,4220 4100,4256.73
SW: C1.2 L1.2 Q1.5 Q1.6 Q1.7 Q1.8 R11.2 U1.6
TEMPSEN: R18.1 R19.2 U3.15 | length 215.1
  Top Layer w7: U3.15 3821.5,4176.5 v1(3840,4195)
  Bottom Layer w7: v1(3840,4195) 3890,4195 3906.73,4211.73 R18.1 3906.73,4253.27 3895,4265 3875,4265 3873.27,4266.73 R19.2
VBAT: pad.1 Q2.5 Q2.6 Q2.7 Q2.8 Q3.5 Q3.6 Q3.7 Q3.8
VBATSEN: R15.1 R16.2 U3.1 | length 163.6
  Top Layer w7: v1(3605,4110) 3605,4125 3616.73,4136.73 R16.2 3635,4165 3646.5,4176.5 U3.1
  Bottom Layer w7: v1(3605,4110) 3606.73,4111.73 R15.1
VLD: C4.2 C5.2 C6.2 C19.2 C20.2 C21.2 C22.2 pad.0@4205,4160 R1.1 R21.2 U1.5 | length 543.9
  Signal Layer 1 w8: v1(3770,4045) 4015,4045 4025,4035 4120,4035
  Bottom Layer w8: R21.2 3758.27,4033.27 v1(3770,4045)
  Bottom Layer w10: v1(4260,4110) 4271.73,4098.27 R1.1
  other v1: 4140,3820 4160,3820 4180,3820 4200,3820 4140,3840 4135,4060 4155,4060 4175,4060 4195,4060 4135,4080 4155,4080 4175,4080 4195,4080
VMCU: C14.2 C18.2 J1.2 R17.2 R18.2 U3.5 VR1.2 | length 314.6
  Top Layer w7: C18.2 3677.58,4055 3694.5,4071.92 3694.5,4088.08 3689.96,4092.62 U3.5
  Bottom Layer w7: v1(3695,4200) 3810,4200 3820,4210 R17.2 3821.73,4235 R18.2
  other v1: 3655,4015 3675,4015 3655,4035 3675,4035
VOUTSEN: R21.1 R22.2 U3.11 | length 233.9
  Top Layer w7: v1(3805,4095) 3810.04,4100.04 U3.11
  Bottom Layer w8: R21.1 3730,4085 3740,4095 v1(3805,4095) 3840,4095 3878.27,4133.27 R22.2
VREF: C16.2 R10.1 R12.2 R14.2 | length 230.3
  Top Layer w7: R10.1 4076.73,4171.73 4080,4175 v1(4080,4195)
  Bottom Layer w7: R12.2@4010,4255 4015,4260 4035,4260 4045,4250 4045,4225 4046.73,4223.27 C16.2 ; v1(4080,4195) 4070,4205 C16.2 ; R14.2 4073.27,4220 C16.2
pads on no net: U3.2 U3.6 U3.7 U3.8 U3.9 U3.13 U3.17 U3.18

## Polygon pours and split planes (outlines as drawn)
SW on Top Layer "Component Side-No Net 1" (solid, remove dead copper, pour order 64): 3940,3890 3885,3890 3880,3895 3880,3940 3935,3940 3940,3935
NetC23_2 on Top Layer "Component Side-No Net 1" (solid, remove dead copper, pour order 63): 3860,3745 3896.24,3745 3900,3748.76 3900,3810 3950,3810 3945,3815 3945,3875 3856.33,3875 3852.86,3871.54 3850,3868.67 3850,3750
SW on Top Layer "Component Side-No Net 1" (solid, remove dead copper, pour order 61): 3847.14,3617.14 3855,3625 4105,3625 4105,4025 4005,4025 3955,4025 3940,4010 3935,4005 3935,3965 3935,3770 3910,3745 3850,3745
LD- on Top Layer "Component Side-No Net 1" (solid, remove dead copper, pour order 80): 3860,4115 3830,4115 3730,4115 3735,4025 4105,4025 4105,4070 4100,4075 4095,4070 3930,4070 3930,4110 3925,4115
GND on Top Layer "Component Side-No Net 1" (solid, remove dead copper, pour order 79): 3440,4440 3440,3495 3480,3455 3615,3320 4090,3320 4370,3320 4450,3400 4510,3460 4510,4355 4510,4445 4455,4500
LD- on Top Layer "Component Side-No Net 1" (solid, remove dead copper, pour order 68): 3860,4055 3945,4055 3945,4100 3945,4115 3955,4125 3960,4130 3970,4130 3970,4200 3860,4200
VMCU on Top Layer "Component Side-No Net 1" (solid, remove dead copper, pour order 65): 3617.92,4074.8 3617.92,3972.08 3620,3970 3625,3965 3685,3965 3685,4045 3655,4075 3650,4075
GND on Top Layer "Component Side-No Net 1" (solid, remove dead copper, pour order 62): 3880.48,4366.37 3875,4360.89 3875,4240 4000,4240 4025,4215 4045,4195 4120,4195 4120,4155 4280,3995 4295,3980 4295,3960 4450,3960 4460,3970 4350,4080 4350,4540 3815,4540 3810,4545
GND on Top Layer "Component Side-No Net 1" (solid, remove dead copper, pour order 58): 3516.17,3940.05 3516.17,4036.17 3520,4075 3630,4075 3630,3954.77 3639.77,3945 3630,3935.23 3630,3905 3633.18,3905 3637.86,3900.32
GND on Top Layer "Component Side-No Net 1" (solid, remove dead copper, pour order 57): 3490,3945 3640,3945 3640,3705 3695,3650 3740,3605 3825,3605 3825,3525 3815,3515 3780,3480 3435,3480
8V4 on Top Layer "Component Side-No Net 1" (solid, remove dead copper, pour order 56): 3655,3940 3730,3940 3730,4030 3735,4025 3855,4025 3855,3625 3850,3620 3845,3615 3820,3615 3800,3615 3785,3600 3745,3600 3740,3600 3715,3625 3645,3695 3645,3710 3645,3935 3650,3940
SGND on Top Layer "Component Side-No Net 1" (solid, remove dead copper, pour order 55): 4240,3830 4240,3880 4280,3880 4280,3945 4315,3945 4320,3940 4315,3935 4315,3850 4315,3840 4295,3820 4290,3825 4240,3825
VLD on Top Layer "Component Side-No Net 1" (solid, remove dead copper, pour order 51): 4145,4000 4210,4000 4225,4015 4235,4025 4265,4025 4280,4040 4285,4045 4285,4085 4285,4110 4275,4120 4220,4120 4145,4120 4120,4095
GND on Top Layer "Component Side-No Net 1" (solid, remove dead copper, pour order 50): 4175,3835 4175,3925 4175,3935 4180,3940 4205,3940 4305,3940 4330,3965 4335,3970 4395,3970 4395,4055 4389.2,4049.2 4355.72,4049.2 4309.2,4049.2 4290,4030 4280,4020 4250,4020 4240,4020 4220,4000 4215,3995 4205,3995 4155,3995 4145,3985 4140,3980 4140,3835
VLD on Top Layer "Component Side-No Net 1" (solid, remove dead copper, pour order 49): 4215,3835 4214.34,3834.34 4214.34,3802.92 4112.08,3802.92 4110,3805 4105,3810 4105,3820 4105,4025 4105,4115 4105,4195 4120,4210 4120,4225 4120,4240 4125,4245 4155,4245 4165,4245 4260,4150 4260,4145 4260,4135 4270,4125 4275,4120 4275,4090 4275,4080 4270,4075 4255,4060 4205,4060 4195,4060 4180,4045 4150,4015 4150,3835
GND on Top Layer "Component Side-No Net 1" (solid, remove dead copper, pour order 48): 3875,3610 3960,3610 3960,3575 3980,3575 3985,3580 3985,3625 4105,3625 4110,3620 4110,3530 4110,3505 4100,3495 4080,3475 3795,3475 3795,3600 3805,3610
BST on Top Layer "Component Side-No Net 1" (solid, remove dead copper, pour order 47): 4125,3690 4130,3685 4160,3685 4160,3730 4175,3745 4175,3780 4155,3780 4153.54,3778.54 4150,3775 4150,3745 4145,3740 4120,3740 4115,3735 4115,3685
SW on Top Layer "Component Side-No Net 1" (solid, remove dead copper, pour order 46): 4115,3685 4160,3685 4160,3660 4115,3660 4105,3650 4105,3640 4105,3625 4005,3625 4005,4025 4105,4025 4105,3810 4110,3805 4145,3805 4215,3805 4215,3780 4190,3780 4155,3780 4150,3775 4150,3750 4150,3745 4145,3740 4135,3740 4120,3740 4115,3735
GND on Signal Layer 1 "Component Side-No Net 1" (solid, remove dead copper, pour order 76): 3485,3455 3500,3470 4315,3470 4315,3485 4380,3550 4445,3615 4445,3885 4445,4190 4435,4200 4335,4300 4335,4330 4260,4330 4110,4480 4095,4465 3725,4465 3680,4465 3610,4395 3490,4275
8V4 on Signal Layer 1 "Component Side-No Net 1" (solid, remove dead copper, pour order 74): 3730,3615 3735,3610 3790,3610 3810,3610 3830,3630 3855,3630 3855,3660 3800,3715 3755,3715 3755,3760 3705,3810 3700,3815 3660,3775 3645,3760 3645,3740 3645,3700
VLD on Signal Layer 1 "Component Side-No Net 1" (solid, remove dead copper, pour order 70): 4215,3810 4215,3790 4070,3790 4065,3795 4065,4035 4100,4035 4110,4045 4115,4050 4115,4090 4125,4090 4135,4080 4145,4070 4145,3980 4145,3865 4155,3855 4200,3855
VLD on Signal Layer 1 "Component Side-No Net 1" (solid, remove dead copper, pour order 89): 4090,3980 4090,4111.31 4103.76,4125.07 4110.9,4117.93 4227.93,4117.93 4227.93,3957.07 4235,3950 4235,3835 4235,3805 4220,3790 4070,3790
VMCU on Signal Layer 1 "Component Side-No Net 1" (solid, remove dead copper, pour order 87): 3645,4045 3685,4045 3690,4050 3690,4090 3690,4180 3685,4185 3685,4205 3690,4210 3700,4210 3705,4205 3710,4200 3710,4180 3710,4030 3690,4010 3685,4005 3660,4005 3645,4005
VLD on Signal Layer 1 "Component Side-No Net 1" (solid, remove dead copper, pour order 52): 4215,3810 4215,3835 4215,3855 4205,3865 4195,3875 4150,3875 4150,4005 4150,4040 4155,4045 4205,4045 4205,4090 4175,4090 4115,4090 4105,4080 4105,4040 4105,3815 4110,3810
GND on Bottom Layer "Component Side-No Net 1" (solid, remove dead copper, pour order 77): 3855.79,4140.79 3960.79,4140.79 3970,4150 3960,4160 3960,4223.27 3838.27,4223.27 3835,4220
VBAT on Bottom Layer "Component Side-No Net 1" (solid, remove dead copper, pour order 66): 3575,3590 4075,3400 4080.03,3677.12 4080.03,3805.03 4120,3845 4110,3855 4110,4045 4100,4045 4000,4145 3993.57,4138.57 3760.22,4138.57 3744.52,4138.57 3505.17,3899.23
GND on Bottom Layer "Component Side-No Net 1" (solid, remove dead copper, pour order 90): 3895,3605 3895,3690 3900,3695 3920.74,3715.74 3949.32,3715.74 3963.46,3715.74 3977.1,3702.1 3972.35,3697.35 3972.35,3605.7
GND on Bottom Layer "Component Side-No Net 1" (solid, pour order 88): 3767.86,3993.66 3770,3991.53 3770,3935 3770,3930 3735,3900 3720,3900 3685,3865 3675,3855 3605,3855 3565,3855 3560,3860 3540,3880 3540,4010
GND on Bottom Layer "Component Side-No Net 1" (solid, remove dead copper, pour order 86): 3570,3790.16 3649.25,3710.92 3831.79,3710.92 3849.25,3710.92 3861.25,3698.91 3856.79,3694.46 3856.79,3550.92 3671.79,3550.92 3646.79,3525.92 3621.79,3550.92 3531.79,3550.92
8V4 on Bottom Layer "Component Side-No Net 1" (solid, remove dead copper, pour order 85): 3720,3620 3730,3610 3790,3610 3805,3610 3825,3630 3825,3645 3825,3650 3815,3660 3680,3795 3675,3795 3645,3765 3617.06,3737.06 3617.06,3735 3617.06,3722.94 3620,3720
GND on Bottom Layer "Component Side-No Net 1" (solid, remove dead copper, pour order 84): 3620,3735 3640,3755 3640,3765 3640,3775 3610,3805 3605,3800 3570,3800 3570,3735 3595,3710
VBAT on Bottom Layer "Component Side-No Net 1" (solid, remove dead copper, pour order 83): 3775,3975 3775,3993.66 3742.64,4026.03 3740,4028.66 3740,4095 3880,4095 3895,4110 3910,4125 4035,4125 4035,4095 4110,4020 4105,4015 4105,3840 4080,3840 4020,3780 4015,3775 3875,3775
VLD on Bottom Layer "Component Side-No Net 1" (solid, remove dead copper, pour order 82): 4095,4035 4210,4035 4210,4095 4215,4100 4210.46,4104.54 4084.57,4104.54
SGND on Bottom Layer "Component Side-No Net 1" (solid, remove dead copper, pour order 81): 3940,4187.44 3970,4157.44 3970,3860 4060,3860 4095,3825 4106.18,3836.18 4179.35,3836.18 4179.35,4005.65 4110,4075
GND on Bottom Layer "Component Side-No Net 1" (solid, remove dead copper, pour order 78): 3436.88,3389.31 3466.88,3419.31 4301.88,3419.31 4301.88,3434.31 4396.88,3529.31 4456.88,3589.31 4456.88,4169.31 4456.88,4259.31 4351.88,4364.31 4306.88,4409.31 4091.88,4409.31 3611.88,4409.31 3576.88,4374.31 3431.88,4229.31 3406.88,4229.31
GND on Bottom Layer "Component Side-No Net 1" (solid, remove dead copper, pour order 75): 3915,3745 3930,3855 4055,3855 4065,3845 4080.09,3845 4080.09,3829.91 4150,3760 4155,3765 4205,3765 4220,3765 4265,3720 4340,3645 4340,3610 4340,3510 4300,3470 4210,3380 4155,3380 3960,3380 3950,3370 3925,3395 3925,3665 3925,3700 3895,3730
VLD on Bottom Layer "Component Side-No Net 1" (solid, remove dead copper, pour order 73): 4090,3875 4120,3845 4225,3845 4225,3810 4215,3800 4150,3800 4150,3760 4060,3670 4020,3630 4020,3625 4015,3625 3990,3650 4020,3680 4020,3705 3985,3740 3985,3795
GND on Bottom Layer "Component Side-No Net 1" (solid, remove dead copper, pour order 72): 3945,4275 3945,4240 3989.71,4240 3994.71,4235 4005,4245.29 4005,4300 3990,4300 3985,4305
GND on Bottom Layer "Component Side-No Net 1" (solid, remove dead copper, pour order 71): 3890,4370 3895,4365 3895,4275 4015,4275 4065,4275 4110.66,4275 4151.58,4234.07 4210,4175.66 4210,3980 4210,3962.5 4227.5,3945 4232.5,3940 4420,3940 4420,4270 4410,4280 4390,4300 4390,4415 3915,4415 3875,4455
SGND on Bottom Layer "Component Side-No Net 1" (solid, remove dead copper, pour order 69): 4020,4135 3980,4135 3955,4135 3945,4145 3940,4150 3940,4235 4000,4235 3995,4230 3995,4175 3995,4160.72 4000,4155.72 4001.56,4157.27 4050.43,4157.27 4050.43,4139.28 4045.43,4134.28
VMCU on Bottom Layer "Component Side-No Net 1" (solid, remove dead copper, pour order 67): 3640,3995 3690,3995 3690,4055 3640,4055
SGND on Bottom Layer "Component Side-No Net 1" (solid, remove dead copper, pour order 60): 4000,4100 4000,4285 4120,4285 4180,4225 4296.31,4108.69 4296.31,3988.69 4296.31,3985.62 4308.46,3973.46 4300,3965 4300,3945 4228.69,3945 4140,3856.31 4126.31,3870 4095,3870 4000,3870 3990,3880
GND on Bottom Layer "Component Side-No Net 1" (solid, remove dead copper, pour order 59): 3550,3955 3590,3955 3605,3970 3615,3980 3615,4055 3515,4055 3510,4060 3495,4045 3495,3850 3545,3850 3550,3855
GND on Bottom Layer "Component Side-No Net 1" (solid, remove dead copper, pour order 54): 4125,3930 4175,3930 4185,3920 4185,3855 4155,3855 4145,3865
SGND on Bottom Layer "Component Side-No Net 1" (solid, remove dead copper, pour order 53): 4215,3820 4305,3820 4315,3830 4320,3835 4320,3845 4320,3855 4325,3860 4325,3895 4325,3960 4295,3990 4160,3990 4140,3990 4130,3980 4125,3975 4125,3880 4125,3860 4130,3855 4135,3850 4155,3850 4155,3830 4165,3820 4215,3820
SGND on Internal Plane 1 (split plane): 4244.9,4142.89 4244.9,4120 4244.9,4080 4245.29,4078.05 4246.4,4076.4 4284.9,4037.89 4284.9,3987.21 4284.9,3970 4285.29,3968.05 4286.4,3966.4 4300.5,3952.29 4302.15,3951.19 4304.1,3950.8 4349.78,3950.8 4350.06,3937.8 4349.98,3937.01 4350.06,3936.22 4349.68,3918.99 4348.51,3901.01 4346.54,3883.09 4343.8,3865.28 4340.29,3847.6 4336,3830.1 4333.09,3820.1 4242.11,3820.1 4195.1,3867.11 4195.1,3955 4194.71,3956.95 4193.6,3958.6 4163.6,3988.6 4161.95,3989.71 4160,3990.1 4107.11,3990.1 4023.6,4073.6 4021.95,4074.71 4020.39,4075.02 4020.39,4164.71 4020,4166.66 4018.89,4168.31 4003.6,4183.6 4001.95,4184.71 4000,4185.1 3967.11,4185.1 3960.1,4192.11 3960.1,4227.89 3972.11,4239.9 4015,4239.9 4016.95,4240.29 4018.6,4241.4 4023.6,4246.4 4024.71,4248.05 4025.1,4250 4025.1,4267.89 4032.11,4274.9 4112.89,4274.9
8V4 on Internal Plane 1 (split plane): 3829.9,3657.89 3829.9,3632.11 3817.89,3620.1 3795,3620.1 3793.05,3619.71 3791.4,3618.6 3777.89,3605.1 3737.11,3605.1 3640.1,3702.11 3640.1,3722.89 3648.6,3731.4 3649.71,3733.05 3650.1,3735 3650.1,3782.89 3662.11,3794.9 3692.89,3794.9
GND on Internal Plane 1 (split plane): 196 vertices, not listed, extent 3523.96,3523.96 4349.29,4350.06

## Keep-outs
Keep-Out Layer:
  circle w10: c3937.01,3937.01 r433.07

## Other copper
Internal Plane 1 (plane layer: these items are gaps in the copper):
  rectangle: 4240,3750 4345,3815
  rectangle: 4175,3670 4200,3690
  rectangle: 3910,3550 3940,3570
  lines w10: 4015.29,4071.95 4015.29,4164.71 4000,4180 3965,4180 3955,4190 3955,4230 3970,4245 4015,4245 4020,4250 4020,4270 4030,4280 4115,4280 4250,4145 4250,4120 4250,4080 4290,4040 4290,3987.21 4290,3970 4304.1,3955.9 4369.67,3955.9 ; 4020,4070 4105,3985 4160,3985 4190,3955 4190,3865 4240,3815 4358.25,3815 4365,3821.75 4365,3912.21 ; 3635,3700 3735,3600 3780,3600 3795,3615 3820,3615 3835,3630 3835,3660 3695,3800 3665,3800 3660,3800 3645,3785 3645,3735 3635,3725 3635,3700

## Silkscreen, mask and mechanical layers (free items; w line width, h text height)
Top Overlay:
  circle w10: c3937.01,3937.01 r393.7
  rectangle: 4010,4000 4100,4030
  rectangle: 4285,3825 4305,3845
  rectangle: 3650,4170 3670,4190
  lines w10: 3920,4115 3930,4125 3985,4125 4000,4140 4000,4170 ; 4160,4105 4180,4125 ; 4160,4125 4180,4125 ; 4180,4105 4180,4125
  text "k" at 3730,4225 h55 r90
  text "R" at 3820,4225 h55 r90
  text "10M" at 3895,4215 h40
  text "LD-" at 3990,4180 h55
  text "Gr" at 3870,4160 h50 r90
  text "LD+" at 4150,4070 h55 r90
  text "Gnd" at 3860,4055 h50 r90
  text "烫" at 4135,3890 h50
  text "JLCJLCJLCJLC" at 3990,3740 h45 r90
  text "35" at 3665,3675 h55
  text "Red" at 3755,3620 h45
  text "35" at 4035,3615 h45
Bottom Overlay:
  circle w10: c3937.01,3937.01 r393.7
  text "T" at 3975,4315 h45 r90
  text "PRD" at 4225,4185 h45 r90
  text "JDBG" at 3790,4150 h50 r315
  text "VBAT" at 3870,4110 h50 r45
  text "R35" at 3950,4110 h50 r270
  text "XTRLaser" at 4140,4065 h50 r90
  text "2509" at 3685,3950 h50
  text "1/2S" at 4110,3830 h50 r45
  text "B33/37" at 4295,3820 h45
  text "KEEN" at 3740,3615 h50 r315
  text "V1.1" at 3975,3565 h50
Top Solder:
  circle w39.37: c3937.01,3937.01 r419.29
Bottom Solder:
  circle w39.37: c3937.01,3937.01 r419.29